# EAGLE board Putri Shaqila_sensor (EAGLE 9.6.2)
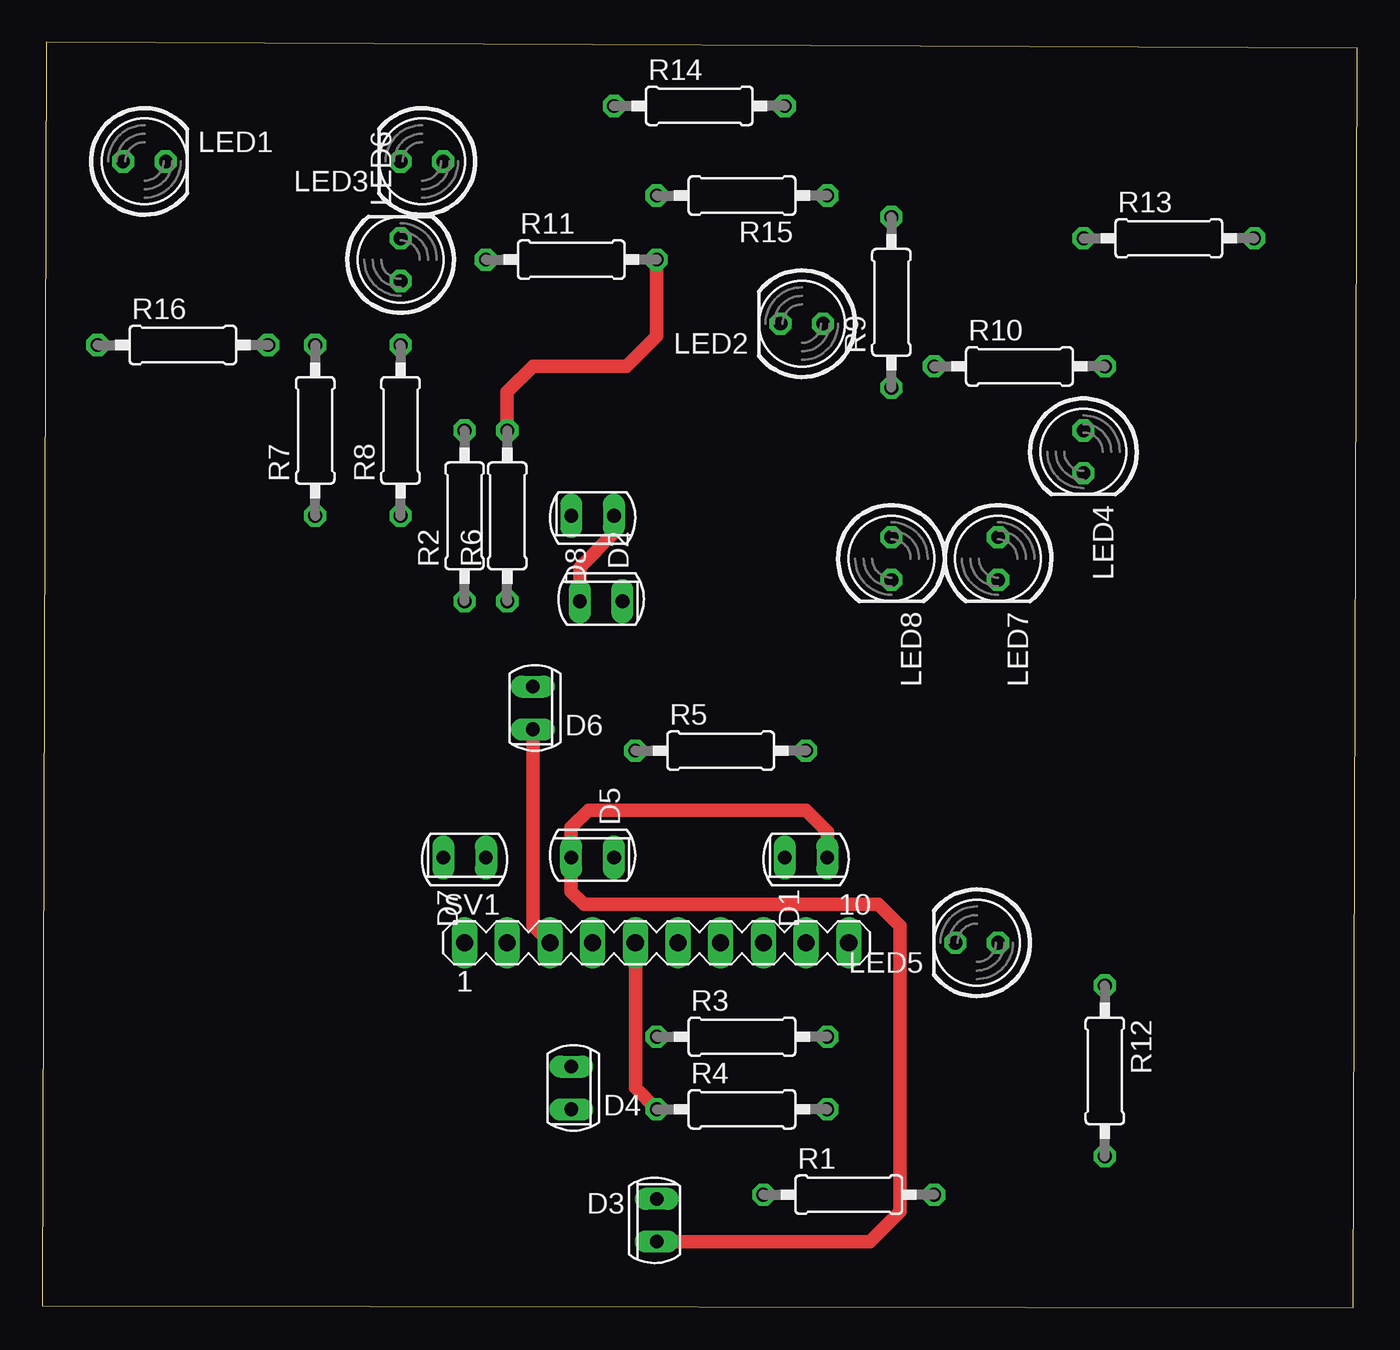
[diagram p0: board, top side]
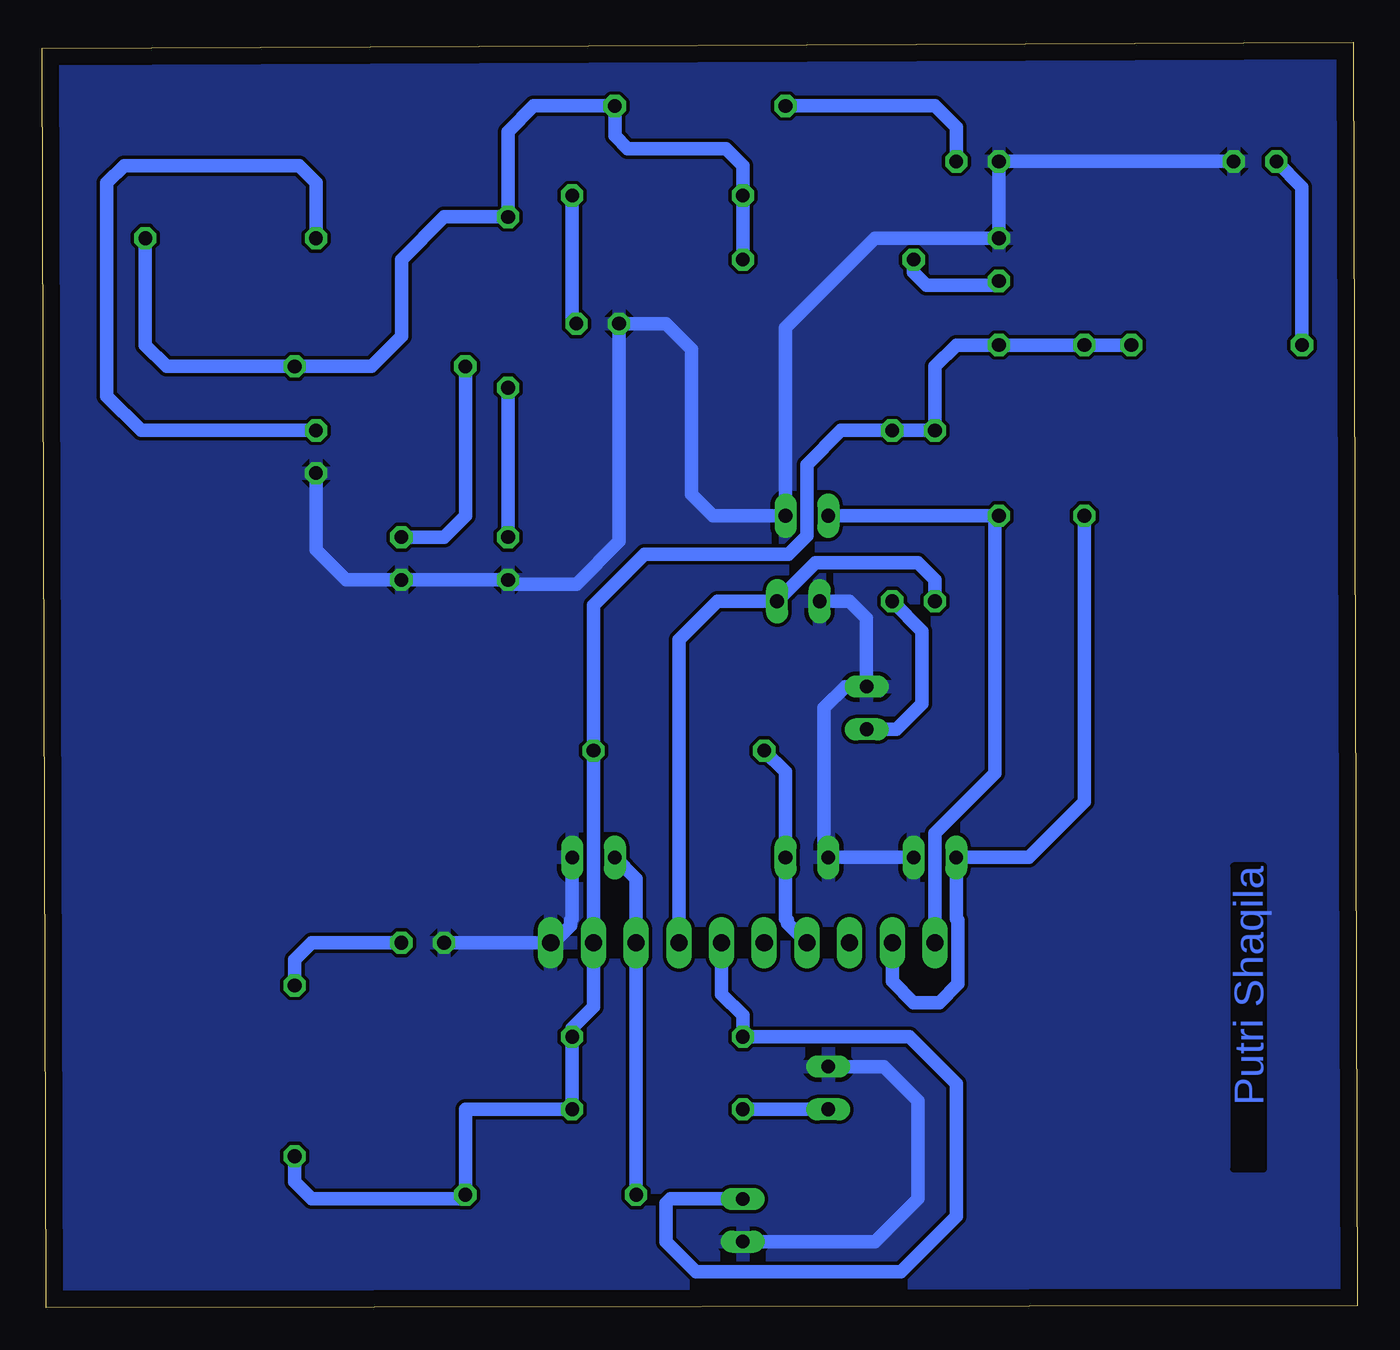
[diagram p1: board, bottom side, seen from below]

Size 78.28 x 75.3 mm. Coordinates in mm from the lower left corner, seen from the top.
Outline: 0,0.13 78.03,0 78.28,74.92 0.25,75.3 0,0.13
Copper layers (1*16): Top 0.035mm / dielectric 1.5mm / Bottom 0.035mm
Design rules "default": minimum track width 10mil, minimum drill 24mil, track to track 8mil, track to pad 8mil, pad to pad 8mil, via to via 8mil, smd to smd 8mil, copper to edge 40mil, drill to drill 8mil, minimum pad ring 10mil, minimum via ring 8mil, stop-mask expansion 4mil, vias tented up to drill 0mil, thermal gap 10mil

## Footprints (pad centres in the part's own frame; a part is rotated, then mirrored left to right if it is on the bottom)
SFH225 = drill 0.813 long: A 0,1.27; K 0,-1.27
LED5MM = drill 0.813 octagon: A -1.27,0; K 1.27,0
0207/10 = drill 0.813 octagon: 1 -5.08,0; 2 5.08,0
MA10-1 = drill 1.016 long: 1 -11.43,0; 2 -8.89,0; 3 -6.35,0; 4 -3.81,0; 5 -1.27,0; 6 1.27,0; 7 3.81,0; 8 6.35,0; 9 8.89,0; 10 11.43,0

## Placement (x,y rotation side)
D1  PhotoDioda  [SFH225]  45.47,26.8 270 top
D2  PhotoDioda  [SFH225]  33.27,42.04 90 top
D3  PhotoDioda  [SFH225]  36.58,5.21 180 top
D4  PhotoDioda  [SFH225]  31.5,13.08 0 top
D5  PhotoDioda  [SFH225]  32.77,26.8 90 top
D6  PhotoDioda  [SFH225]  29.21,35.69 0 top
D7  PhotoDioda  [SFH225]  25.15,26.8 270 top
D8  PhotoDioda  [SFH225]  32.77,47.12 270 top
LED1  LED putih SB  [LED5MM]  6.1,68.2 0 top
LED2  LED putih SB  [LED5MM]  45.21,58.55 180 top
LED3  LED putih SB  [LED5MM]  22.61,68.2 180 top
LED4  LED putih SB  [LED5MM]  61.98,50.93 270 top
LED5  LED putih SB  [LED5MM]  55.63,21.72 180 top
LED6  LED putih SB  [LED5MM]  21.34,62.36 90 top
LED7  LED putih SB  [LED5MM]  56.9,44.58 270 top
LED8  LED putih SB  [LED5MM]  50.55,44.58 270 top
R1  [0207/10]  48.01,6.73 0 top
R2  [0207/10]  25.15,47.12 90 top
R3  [0207/10]  41.66,16.13 0 top
R4  [0207/10]  41.66,11.81 0 top
R5  [0207/10]  40.39,33.15 0 top
R6  [0207/10]  27.69,47.12 90 top
R7  [0207/10]  16.26,52.2 90 top
R8  [0207/10]  21.34,52.2 90 top
R9  330  [0207/10]  50.55,59.82 90 top
R10  330  [0207/10]  58.17,56.01 0 top
R11  330  [0207/10]  31.5,62.36 0 top
R12  330  [0207/10]  63.25,14.1 270 top
R13  330  [0207/10]  67.06,63.63 0 top
R14  330  [0207/10]  39.12,71.5 0 top
R15  330  [0207/10]  41.66,66.17 180 top
R16  330  [0207/10]  8.38,57.28 0 top
SV1  [MA10-1]  36.58,21.72 0 top

## Library data of the parts
D1-D8 = opto-trans-siemens
LED1-LED8 = led
R1-R16 = resistor
SV1 = con-lstb

## Nets
GND: D1.A D2.A D3.A D4.A D5.A D6.A D7.A D8.A LED1.K LED2.K LED3.K LED4.K LED5.K LED6.K LED7.K LED8.K SV1.10
N$1: LED7.A R10.1
N$2: D7.K R7.1 SV1.2
N$3: D8.K R8.1 SV1.1
N$4: D1.K R1.1 SV1.8
N$5: D2.K R2.1 SV1.7
N$6: D3.K R3.1 SV1.6
N$7: D5.K R5.1 SV1.4
N$8: D4.K R4.1 SV1.5
N$9: D6.K R6.1 SV1.3
N$10: LED6.A R11.1
N$11: LED5.A R12.1
N$12: LED4.A R13.1
N$13: LED3.A R14.1
N$14: LED2.A R15.1
N$15: LED1.A R16.1
N$16: LED8.A R9.1
VCC: R1.2 R2.2 R3.2 R4.2 R5.2 R6.2 R7.2 R8.2 R9.2 R10.2 R11.2 R12.2 R13.2 R14.2 R15.2 R16.2 SV1.9

## Tracks (layer width: path | path; a pad name or v marks a point on that pad's centre or on a via)
GND
  Top 0.813: D8.A 34.04,46.1 32,44.07 D2.A | D1.A 46.74,28.32 45.47,29.59 32.51,29.59 31.5,28.57 D5.A 31.5,24.77 32.26,24 49.78,24 51.05,22.73 51.05,5.71 49.28,3.94 D3.A
  Bottom 0.813: D1.A 46.74,23.15 46.84,23.05 46.84,22.73 47.85,21.72 SV1.10 LED5.K | D3.A 28.7,3.94 26.16,6.48 26.16,12.32 28.19,14.35 D4.A | LED1.K LED3.K LED6.K 28.7,63.63 34.04,58.29 D8.A 38.35,47.12 39.62,48.39 39.62,57.02 41.15,58.55 LED2.K 43.94,45.59 46.48,43.05 50.29,43.05 LED8.K LED7.K 60.2,43.31 61.98,45.09 LED4.K | D7.A D5.A 31.75,27.05 31.75,35.69 30.48,36.96 D6.A | D6.A 28.45,36.96 28.45,36.7 28.96,36.7 D6.A | D2.A 30.23,42.04 29.21,41.02 D6.A
  pour Bottom: 0,75.06 77.98,75.06 77.98,0.13 0,0.13
N$1
  Bottom 0.813: R10.1 53.09,47.12 54.36,45.85 LED7.A
N$2
  Bottom 0.813: R7.1 16.26,30.1 19.56,26.8 D7.K 23.88,23.15 23.77,23.05 23.77,19.28 24.89,18.16 26.42,18.16 27.69,19.43 SV1.2
N$3
  Bottom 0.813: SV1.1 25.15,28.24 21.59,31.79 21.59,46.86 R8.1 D8.K
N$4
  Bottom 0.813: R1.1 SV1.8 42.93,25.53 D1.K
N$5
  Bottom 0.813: SV1.7 40.39,39.75 38.1,42.04 D2.K 32.26,44.32 26.16,44.32 25.15,43.31 R2.1
N$6
  Bottom 0.813: D3.K 40.89,6.48 41.15,6.22 41.15,3.94 39.37,2.16 27.18,2.16 23.88,5.46 23.88,13.33 26.67,16.13 R3.1 36.58,17.4 37.85,18.67 SV1.6
N$7
  Bottom 0.813: R5.1 34.04,31.88 D5.K 34.04,23.15 33.93,23.05 33.93,22.88 SV1.4
N$8
  Top 0.813: SV1.5 35.31,13.08 R4.1
  Bottom 0.813: R4.1 D4.K
N$9
  Top 0.813: D6.K 29.21,22.73 SV1.3
  Bottom 0.813: R6.1 25.91,40.26 25.91,35.94 27.43,34.42 D6.K
N$10
  Bottom 0.813: R11.1 26.42,61.59 25.65,60.83 21.59,60.83 LED6.A
N$11
  Bottom 0.813: LED5.A 62.23,21.72 63.25,20.7 R12.1
N$12
  Bottom 0.813: R13.1 61.98,66.93 62.99,67.95 73.41,67.95 74.42,66.93 74.42,54.23 72.39,52.2 LED4.A
N$13
  Bottom 0.813: LED3.A 23.88,70.23 25.15,71.5 R14.1
N$14
  Bottom 0.813: R15.1 46.74,58.8 LED2.A
N$15
  Bottom 0.813: LED1.A 3.3,66.68 R16.1
N$16
  Bottom 0.813: R9.1 LED8.A
VCC
  Top 0.813: R6.2 27.69,54.48 29.21,56.01 34.8,56.01 36.58,57.79 R11.2
  Bottom 0.813: R12.2 63.25,7.49 62.23,6.48 53.34,6.48 R1.2 53.09,11.81 R4.2 R3.2 46.74,16.64 45.47,17.91 SV1.9 R5.2 45.47,41.78 42.42,44.83 33.87,44.83 32.77,45.93 32.77,50.16 30.73,52.2 R6.2 R2.2 25.15,56.01 23.88,57.28 R8.2 R7.2 R16.2 | R11.2 R15.2 36.58,67.95 37.59,68.96 43.43,68.96 44.2,69.72 R14.2 49.02,71.5 50.55,69.98 R9.2 54.36,64.9 56.9,62.36 56.9,57.79 58.67,56.01 R10.2 70.87,56.01 72.14,57.28 R13.2

## Text on the board
Bottom: Putri Shaqila